# EAGLE board LapoCore (EAGLE 6.6.0)
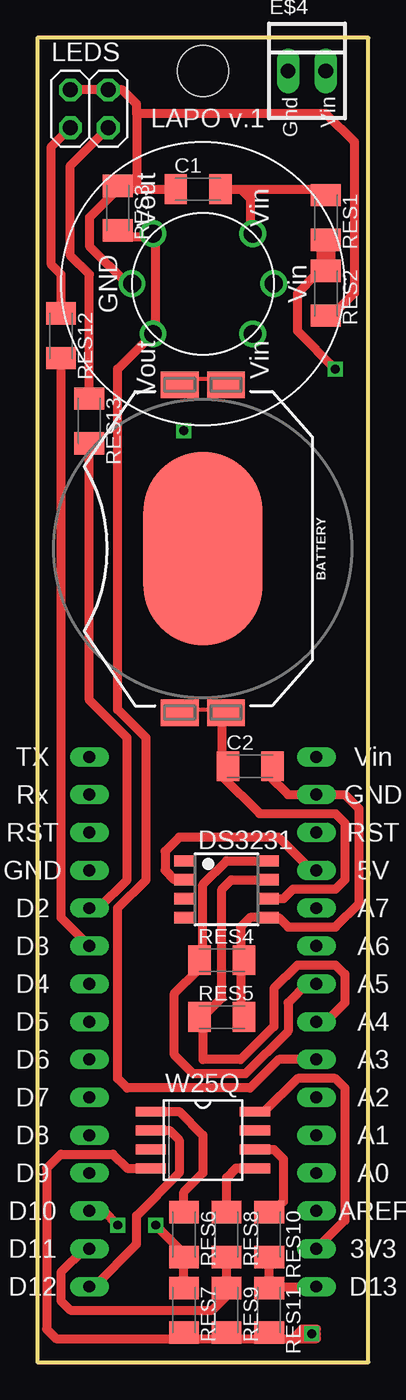
[diagram p0: board, top side]
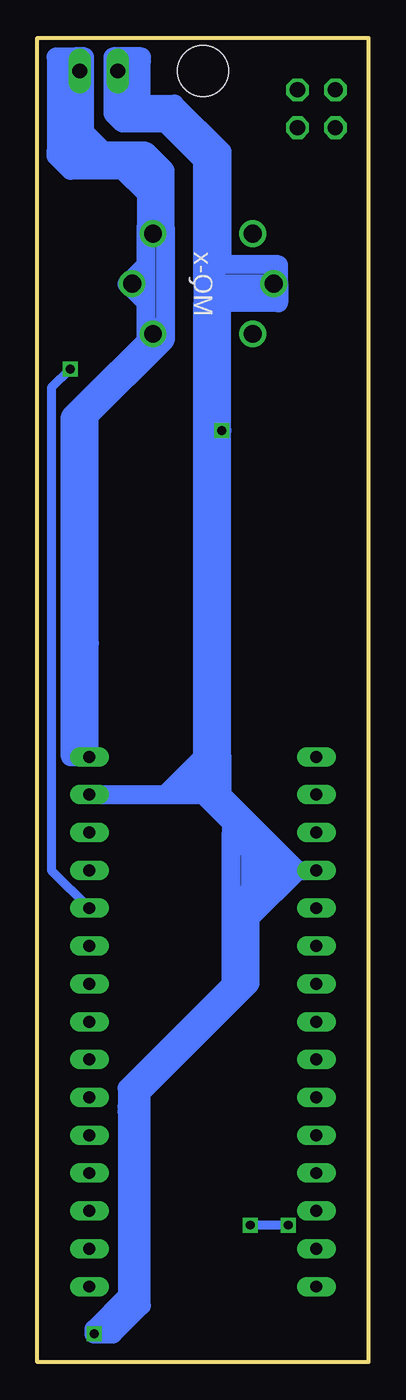
[diagram p1: board, bottom side, seen from below]

Size 22.22 x 88.9 mm. Coordinates in mm from the lower left corner, seen from the top.
Outline: 0,0 22.22,0 22.22,88.9 0,88.9 0,0
Copper layers (1*16): Top 0.035mm / dielectric 1.5mm / Bottom 0.035mm
Design rules "default": minimum track width 10mil, minimum drill 24mil, track to track 8mil, track to pad 8mil, pad to pad 8mil, via to via 8mil, smd to smd 8mil, copper to edge 40mil, drill to drill 8mil, minimum pad ring 10mil, minimum via ring 8mil, stop-mask expansion 4mil, vias tented up to drill 0mil, thermal gap 10mil
Holes 3.43 mm at 11.11,86.68

## Footprints (pad centres in the part's own frame; a part is rotated, then mirrored left to right if it is on the bottom)
BATTCON_20MM_4LEGS_OVERPASTE = smd 1.778 x 2.54: 1 -11,1.55; 3 11,1.55; P$1 -11,-1.55; P$2 11,-1.55 | smd 13 x 8: 2 0,0
C1206K = smd 1.5 x 2: 1 -1.5,0; 2 1.5,0
SOP8 = smd 0.76 x 1.27: 1 -1.905,-2.86; 2 -0.635,-2.86; 3 0.635,-2.86; 4 1.905,-2.86; 5 1.905,2.86; 6 0.635,2.86; 7 -0.635,2.86; 8 -1.905,2.86
MQ-X = drill 1.2: A$1 -3.36,3.35; A$2 -3.36,-3.35; B$1 3.36,3.35; B$2 3.36,-3.35; H$1 0,4.75; H$2 0,-4.75
22-23-2021 = drill 1 long: 1 -1.27,0; 2 1.27,0
NANO_EVERY = drill 0.8 long: 3.3V -10.16,24.13; 5V -10.16,-1.27; A0 -10.16,19.05; A1 -10.16,16.51; A2 -10.16,13.97; A3 -10.16,11.43; A4 -10.16,8.89; A5 -10.16,6.35; A6 -10.16,3.81; A7 -10.16,1.27; AREF -10.16,21.59; D2 5.08,1.27; D3 5.08,3.81; D4 5.08,6.35; D5 5.08,8.89; D6 5.08,11.43; D7 5.08,13.97; D8 5.08,16.51; D9 5.08,19.05; D10 5.08,21.59; D11 5.08,24.13; D12 5.08,26.67; D13 -10.16,26.67; GND -10.16,-6.35; GND1 5.08,-1.27; RAW -10.16,-8.89; RST -10.16,-3.81; RST1 5.08,-3.81; RX1 5.08,-6.35; TX0 5.08,-8.89
2X02 = drill 1.016 octagon: 1 -1.27,-1.27; 2 -1.27,1.27; 3 1.27,-1.27; 4 1.27,1.27
SO08-208 = smd 0.66 x 2.032: 1 -1.905,-3.498; 2 -0.635,-3.498; 3 0.635,-3.498; 4 1.905,-3.498; 5 1.905,3.498; 6 0.635,3.498; 7 -0.635,3.498; 8 -1.905,3.498

## Placement (x,y rotation side)
BATTERY  [BATTCON_20MM_4LEGS_OVERPASTE]  11.11,54.61 270 top
C1  [C1206K]  10.79,78.74 0 top
C2  [C1206K]  14.29,40 0 top
DS3231  [SOP8]  12.7,31.75 270 top
E$2  [MQ-X]  11.11,72.39 270 top
E$4  [22-23-2021]  18.1,86.68 0 top
E$7  [NANO_EVERY]  8.57,31.75 180 top
LEDS  [2X02]  3.49,84.14 0 top
RES1  10k  [C1206K]  19.37,76.83 270 top
RES2  10k  [C1206K]  19.37,71.75 270 top
RES3  10K  [C1206K]  5.4,77.47 270 top
RES4  10K  [C1206K]  12.38,26.99 0 top
RES5  10K  [C1206K]  12.38,23.18 0 top
RES6  4.7K  [C1206K]  9.84,8.57 270 top
RES7  10K  [C1206K]  9.84,3.49 270 top
RES8  4.7K  [C1206K]  12.7,8.57 270 top
RES9  10K  [C1206K]  12.7,3.49 270 top
RES10  4.7K  [C1206K]  15.56,8.57 270 top
RES11  10K  [C1206K]  15.56,3.49 270 top
RES12  10k  [C1206K]  1.59,68.9 270 top
RES13  10k  [C1206K]  3.49,63.18 270 top
W25Q  [SO08-208]  11.11,14.92 270 top

## Library data of the parts
BATTERY = SparkFun-Batteries
C1 C2 = ref-packages-longpad
DS3231 = mitsubishi-semiconductor
E$2 = MQ_x
E$4 = con-molex
E$7 = Arduino
LEDS = pinhead
RES1-RES13 = resistor
W25Q = maxim

## Nets
S$1: E$7.5V
S$4: E$7.A4
S$5: E$7.A5
S$6: E$7.D10
S$9: E$7.3.3V
S$18: E$7.A7
S$19: E$7.D12
S$21: E$7.D13
S$22: E$7.D2
S$23: LEDS.1
S$24: LEDS.3
S$26: E$7.A3
S$27: E$7.D11
S$28: E$7.D3
S$29: E$7.RAW
S$30: E$7.GND E$7.GND1

## Tracks (layer width: path | path; a pad name or v marks a point on that pad's centre or on a via)
S$1
  Top 0.61: E$7.5V 18.41,33.02 16.19,35.24 9.52,35.24 8.57,34.29 8.57,33.02 9.21,32.38 9.84,32.38
S$2
  Top 0.61: 20,70.48 21.27,71.75 21.27,81.91 19.37,83.82 6.67,83.82 | 6.67,78.74 5.4,78.74 3.49,76.83 3.49,74.93 6.03,72.39 | 6.67,83.82 6.67,78.74 | 6.67,78.74 9.21,78.74 | 6.67,83.82 6.67,84.45 5.72,85.41 1.91,85.41
S$3
  Top 0.254: 10.48,43.81 11.75,43.81
S$4
  Top 0.61: E$7.A4 19.37,22.86 20.64,24.13 20.64,26.04 20,26.67 17.46,26.67 15.88,25.08 15.88,22.54 13.65,20.32 11.11,20.32 11.11,23.18 12.38,24.45 12.38,31.75 13.02,32.38 15.24,32.38
S$5
  Top 0.61: E$7.A5 18.1,25.4 16.83,24.13 16.83,22.23 13.97,19.37 10.48,19.37 9.21,20.64 9.21,24.77 10.79,26.35 11.11,26.35 11.11,32.07 12.7,33.66 15.56,33.66
S$6  (via drill 0.6)
  Top 0.61: E$7.D10 4.44,10.16 v5.4,9.21 | v7.94,9.21 9.84,7.3
  Bottom 0.61: v5.4,9.21 v7.94,9.21
S$7
  Top 0.254: 12.38,43.18 12.38,43.81
  Top 0.61: 12.38,43.18 12.38,39.37 14.92,36.83 20,36.83 20.64,36.2 20.64,32.38 20,31.75 17.15,31.75 16.51,31.11 15.56,31.11
S$8
  Top 0.254: 10.48,66.04 11.75,66.04
S$9
  Top 0.61: E$7.3.3V 20.64,9.53 20.64,18.42 20,19.05 17.46,19.05 15.24,16.83
S$10
  Top 0.61: 15.24,29.85 14.29,29.85 13.65,29.21 13.65,23.18
S$11
  Top 0.61: 13.65,78.74 14.29,78.11 | 14.29,78.11 14.29,76.2 | 13.65,78.74 14.29,78.74 | 14.29,78.74 14.29,78.11 | 12.38,78.74 13.65,78.74 | 14.29,78.74 20,78.74
S$12
  Top 0.61: 12.7,10.48 12.7,12.38 13.34,13.02 14.29,13.02
S$15
  Top 0.61: 17.15,1.59 1.27,1.59 0.63,2.22 0.63,13.02 1.59,13.97 5.08,13.97 6.03,13.02 7.3,13.02 | 17.46,1.59 18.73,1.59 18.73,1.9 | 18.73,1.9 18.73,2.22 17.78,2.22 17.15,1.59 | 17.15,1.59 17.46,1.59 | 17.46,1.59 17.78,1.9 18.73,1.9
S$16
  Top 0.61: 9.84,5.08 9.84,6.98
S$17
  Top 0.61: 15.56,39.37 16.83,38.1 20.64,38.1 21.59,37.15 21.59,30.8 20,29.21 16.83,29.21 16.19,29.85 15.56,29.85
S$18  (via drill 0.6)
  Top 0.61: v20,66.67 17.46,69.22 17.46,71.75 18.73,73.02
  Bottom 0.61: v20,66.67 21.27,65.41 21.27,33.02 E$7.A7
S$19
  Top 0.61: 8.25,15.56 8.89,15.56 9.52,14.92 9.52,12.7 6.67,9.84 6.67,7.94 3.81,5.08 E$7.D12
S$20
  Top 0.61: 15.24,14.29 15.88,14.29 16.51,13.65 16.51,10.79 15.88,10.16
S$21
  Top 0.61: E$7.D13 15.56,5.08 15.56,6.98
S$22
  Top 0.61: E$7.D2 4.13,30.48 6.03,32.38 6.03,41.91 3.49,44.45 3.49,61.59
S$23
  Top 0.61: LEDS.1 0.95,81.6 0.95,73.66 1.59,73.02 1.59,70.48
S$24
  Top 0.61: LEDS.3 2.22,80.33 2.22,74.3 3.49,73.02 3.49,64.77
S$25
  Top 0.61: 18.73,74.93 19.37,74.93
  Top 1.27: 19.37,74.93 19.37,73.66
S$26
  Top 0.61: E$7.A3 16.19,20.32 14.29,18.42 6.03,18.42 5.4,19.05 5.4,30.48 7.3,32.38 7.3,41.91 5.4,43.81 5.4,66.67 7.94,69.22 7.94,75.56 4.76,75.56
S$27
  Top 0.61: E$7.D11 3.17,7.62 1.59,6.03 1.59,4.13 2.22,3.49 11.75,3.49 12.7,4.45 12.7,6.98
S$28
  Top 0.61: E$7.D3 1.59,29.85 1.59,67.63
S$29
  Bottom 1.27: 19.05,82.87 19.05,87.63 19.68,87.63 | 19.68,87.63 20.32,87.63 20.95,87.63 20.95,81.28 | 19.68,87.63 19.68,86.04 | 20,87.63 20,85.72 19.68,86.04 | 19.68,86.04 19.68,81.91 | 20.95,81.28 20.32,80.64 16.19,80.64 14.92,79.38 | 18.73,48.26 E$7.RAW 20,40.64 20,49.53 | 20,49.53 20,63.5 18.73,64.77 | 18.73,64.77 14.92,68.58 | 14.92,68.58 14.92,71.12 | 14.92,71.12 16.19,72.39 14.92,73.66 | 14.92,73.66 14.92,76.2 | 14.92,76.2 13.65,76.2 | 13.65,76.2 13.65,69.85 | 13.65,69.85 14.92,68.58 | 14.92,71.12 14.92,73.66 | 20,49.53 18.73,48.26 | 18.73,48.26 18.73,63.5 | 18.73,63.5 18.73,64.77 | 13.65,69.85 13.65,68.58 18.73,63.5 | 13.65,76.2 13.65,80.01 14.92,81.28 17.78,81.28 | 14.92,79.38 14.92,78.42 | 14.92,78.42 14.92,76.2 | 14.92,79.38 14.92,80.64 | 17.78,81.28 18.1,81.28 | 18.1,81.28 19.68,81.28 20,81.6 20,83.19 | 20,85.41 20,83.19 | 18.1,81.28 20,83.19 | 14.92,78.42 16.51,80.01 20,80.01 20.95,80.96 20.95,81.28 | 19.05,82.55 17.78,81.28
S$30  (via drill 0.6)
  Bottom 1.27: 16.51,87.31 16.51,84.77 16.19,84.77 16.19,87.31 | 16.51,87.31 16.19,87.31 | 15.24,87.31 16.19,87.31 | 15.24,87.31 15.24,84.45 13.02,84.45 9.84,81.28 9.84,74.3 10.48,73.66 10.48,81.28 13.02,83.82 | 15.24,87.31 15.24,87.63 16.51,87.63 | 16.51,87.63 16.51,87.31 | 16.51,87.63 17.15,87.63 17.15,83.82 16.51,83.19 | 16.19,16.83 16.19,4.45 18.41,2.22 v18.41,1.9 17.15,1.9 15.24,3.81 15.24,18.1 | 8.57,31.11 7.94,31.75 7.94,34.29 9.21,35.56 | 9.21,36.83 9.21,35.56 | 9.21,35.56 9.21,25.4 16.19,18.42 16.19,17.14 15.24,18.1 | 11.11,69.85 11.11,40.64 13.65,38.1 E$7.GND 12.38,38.1 | 11.11,69.85 11.11,71.12 | 11.11,71.12 9.84,72.39 6.03,72.39 | 6.03,72.39 6.03,73.66 9.84,73.66 11.11,72.39 | 11.11,72.39 11.11,71.12 | 6.03,72.39 6.03,71.12 9.84,71.12 | 9.84,71.12 11.11,69.85 | 11.11,39.37 9.84,40.64 | 9.84,40.64 v9.84,62.55 9.84,71.12 | 4.76,33.02 9.84,38.1 | 9.84,38.1 11.11,39.37 | 11.11,39.37 12.38,38.1 | 12.38,38.1 11.11,38.1 7.3,34.29 | 7.3,34.29 6.03,33.02 | 6.03,33.02 4.76,33.02 | 4.76,33.02 E$7.GND1 | 9.84,40.64 9.84,38.1 | 6.03,33.02 8.57,30.48 8.57,25.4 15.56,18.42 | 15.24,18.1 7.94,25.4 7.94,29.85 4.76,33.02 | 7.3,31.11 7.3,34.29 | 11.11,72.39 11.11,80.64 13.65,83.19 16.51,83.19 | 16.51,83.19 16.51,84.45 15.56,84.45 15.56,83.82
S$31
  Top 0.61: 8.25,16.83 9.52,16.83 11.11,15.24 11.11,12.7 9.84,11.43 9.84,10.16

## Text on the board
tNames: LAPO v.1 | Vin | Gnd